# Altium PCB DataMergeBoard.PcbDoc (part 2 of 2)
Units mil, origin at the board's own origin, x right, y up, seen from the top; angles counter-clockwise.
Board outline 5250 x 1030 mil, 4 copper layers (Top Layer, Internal Plane 1, Internal Plane 2, Bottom Layer), stack 30.634 mil thick; 115 components, 100 nets, 456 pads, 199 vias.
Unrouted connection lines stored in the file: 1.
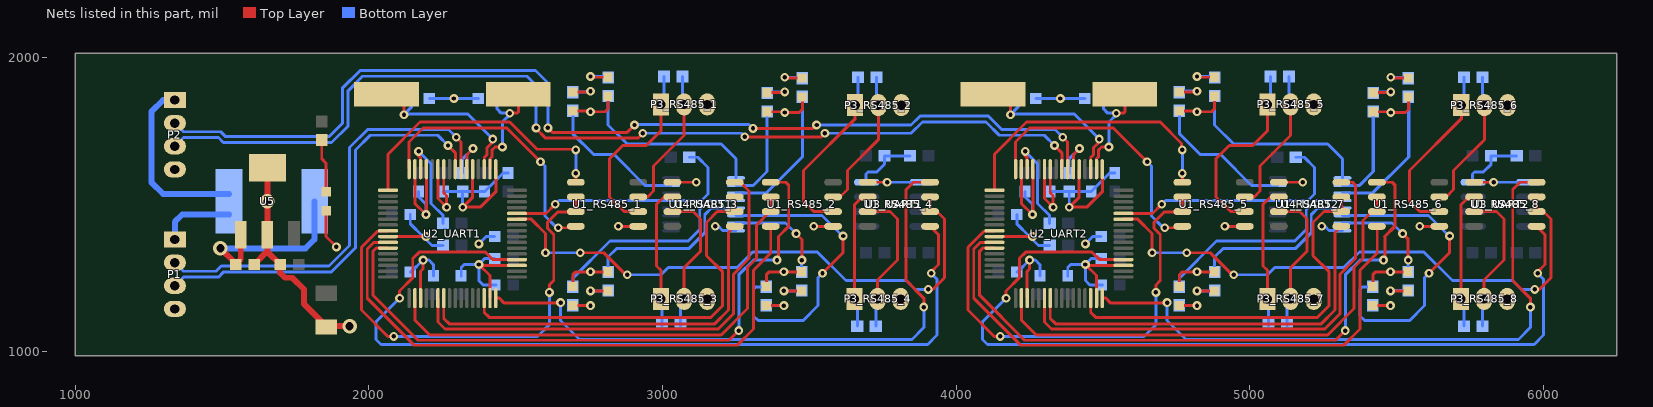
[diagram p4: the nets of this part, all layers, seen from the top]

## Via types
v1: diameter 30, hole 15, Top Layer to Bottom Layer, 191 vias
v2: diameter 50, hole 28, Top Layer to Bottom Layer, 4 vias
v3: diameter 200, hole 125, Top Layer to Bottom Layer, 4 vias

## Nets (pads, with @x,y where several pads share a name; then routed paths per layer and width w, separated by ;. In a path a pad name is that pad's centre, name@x,y a point inside that pad or via, vN(x,y) a via of type N, cw(c..) or ccw(c..) an arc to the next point about the centre after c; other vN are vias at no path point) (continued)
GND: C1_UART1.1 C1_UART2.1 C2_UART1.1 C2_UART2.1 C3_UART1.1 C3_UART2.1 C4_UART1.1 C4_UART2.1 C5_UART1.1 C5_UART2.1 C6_UART1.1 C6_UART2.1 C7_UART1.1 C7_UART2.1 C8_UART1.2 C8_UART2.2 C9_UART1.2 C9_UART2.2 C10_UART1.1 C10_UART2.1 C11_UART1.2 C11_UART2.2 C13_UART1.1 C13_UART2.1 C15_UART1.2 C15_UART2.2 C16.1 C17.2 C18.2 LED1_RS485_1.C LED1_RS485_2.C LED1_RS485_3.C LED1_RS485_4.C LED1_RS485_5.C LED1_RS485_6.C LED1_RS485_7.C LED1_RS485_8.C LED2_RS485_1.C LED2_RS485_2.C LED2_RS485_3.C LED2_RS485_4.C LED2_RS485_5.C LED2_RS485_6.C LED2_RS485_7.C LED2_RS485_8.C LED3.C P1.4 P2.4 P3_RS485_1.3 P3_RS485_2.3 P3_RS485_3.3 P3_RS485_4.3 P3_RS485_5.3 P3_RS485_6.3 P3_RS485_7.3 P3_RS485_8.3 R8_UART1.2 R8_UART2.2 R11_UART1.2 R11_UART2.2 U1_RS485_1.5 U1_RS485_2.5 U1_RS485_3.5 U1_RS485_4.5 U1_RS485_5.5 U1_RS485_6.5 U1_RS485_7.5 U1_RS485_8.5 U2_UART1.1 U2_UART1.5 U2_UART1.10 U2_UART1.11 U2_UART1.13 U2_UART1.15 U2_UART1.25 U2_UART1.35 U2_UART1.47 U2_UART1.51 U2_UART2.1 U2_UART2.5 U2_UART2.10 U2_UART2.11 U2_UART2.13 U2_UART2.15 U2_UART2.25 U2_UART2.35 U2_UART2.47 U2_UART2.51 U3_UART1.5 U3_UART2.5 U4_UART1.8 U4_UART2.8 U5.2 U5.4 | length 8612.1
  Top Layer w10: LED3.C@1855,1467.68 1855,1390 v1(1890,1355) ; U2_UART1.25@2065.51,1390.16 v1(2195.16,1390.16) ; U2_UART1.15@2157.05,1619.49 2157.05,1502.95 v1(2195,1465) 2196.42,1466.42 U2_UART1.13@2196.42,1619.49 ; U2_UART1.35@2176.73,1180.51 2176.73,1271.73 2185,1280 v1(2185,1310) ; U2_UART1.11@2235.79,1619.49 2235.79,1519.21 v1(2265,1490) 2265,1530 2255.47,1539.53 U2_UART1.10@2255.47,1619.49 ; U2_UART1.5@2353.9,1619.49 2353.9,1523.9 v1(2320,1490) 2380,1490 2432.64,1542.64 U2_UART1.1@2432.64,1619.49 ; v1(2375,1295) v1@2378.27,1291.73 ; U2_UART1.47@2412.95,1180.51 2412.95,1257.05 v1@2378.27,1291.73 ; U2_UART1.51@2504.49,1291.73 v1@2378.27,1291.73 ; LED1_RS485_3.C@2695,1219.96 2695,1260 2705,1270 v1(2755,1270) v1(2755,1270) LED2_RS485_3.C@2815,1269.96 ; LED1_RS485_1.C@2695,1817.52 2752.48,1817.52 v1(2755,1815) 2805,1815 2815,1825 LED2_RS485_1.C@2815,1867.52 ; v1(2850,1425) U1_RS485_1.5@2917.6,1425 ; U1_RS485_3.5@3038.7,1580 U1_RS485_3.5@3033.7,1575 v1(3115,1575) ; LED1_RS485_4.C@3353.7,1219.96 3353.7,1260 3363.7,1270 v1(3413.7,1270) v1(3413.7,1270) LED2_RS485_4.C@3473.7,1269.96 ; LED1_RS485_2.C@3356.18,1815.04 3413.66,1815.04 v1(3416.18,1812.52) 3466.18,1812.52 3476.18,1822.52 LED2_RS485_2.C@3476.18,1865.04 ; v1(3515,1425) U1_RS485_2.5@3581.3,1425 ; U1_RS485_4.5@3703.7,1570 U1_RS485_4.5@3698.7,1575 v1(3765,1575) ; U2_UART2.25@4130.51,1390.16 v1(4260.16,1390.16) ; U2_UART2.15@4222.05,1619.49 4222.05,1502.95 v1(4260,1465) 4261.42,1466.42 U2_UART2.13@4261.42,1619.49 ; U2_UART2.35@4241.73,1180.51 4241.73,1271.73 4250,1280 v1(4250,1310) ; U2_UART2.11@4300.79,1619.49 4300.79,1519.21 v1(4330,1490) 4330,1530 4320.47,1539.53 U2_UART2.10@4320.47,1619.49 ; U2_UART2.5@4418.9,1619.49 4418.9,1523.9 v1(4385,1490) 4445,1490 4497.64,1542.64 U2_UART2.1@4497.64,1619.49 ; v1(4440,1295) v1@4443.27,1291.73 ; U2_UART2.47@4477.95,1180.51 4477.95,1257.05 v1@4443.27,1291.73 ; U2_UART2.51@4569.49,1291.73 v1@4443.27,1291.73 ; LED1_RS485_7.C@4760,1219.96 4760,1260 4770,1270 v1(4820,1270) v1(4820,1270) LED2_RS485_7.C@4880,1269.96 ; LED1_RS485_5.C@4760,1817.52 4817.48,1817.52 v1(4820,1815) 4870,1815 4880,1825 LED2_RS485_5.C@4880,1867.52 ; v1(4915,1425) U1_RS485_5.5@4982.6,1425 ; U1_RS485_7.5@5103.7,1580 U1_RS485_7.5@5098.7,1575 v1(5180,1575) ; LED1_RS485_8.C@5418.7,1219.96 5418.7,1260 5428.7,1270 v1(5478.7,1270) v1(5478.7,1270) LED2_RS485_8.C@5538.7,1269.96 ; LED1_RS485_6.C@5419.88,1815.04 5477.36,1815.04 v1(5479.88,1812.52) 5529.88,1812.52 5539.88,1822.52 LED2_RS485_6.C@5539.88,1865.04 ; v1(5578.7,1425) U1_RS485_6.5@5645,1425 ; U1_RS485_8.5@5768.7,1570 U1_RS485_8.5@5763.7,1575 v1(5830,1575)
  Top Layer w20: C17.2@1610,1295 1655,1340 ; U5.4@1655,1624.17 v2(1655,1510) U5.2@1655,1395.83 1655,1340 ; v2(1935,1085) 1855,1085 1780,1160 1780,1210 1740,1250 1715,1250 1698.5,1266.5 C18.2@1698.5,1295 1655,1338.5 1655,1340
  Bottom Layer w10: C5_UART1.1@2141.5,1270 2145,1270 v1(2185,1310) 2205,1310 2220,1295 C2_UART1.1@2220,1256.5 ; C4_UART1.1@2141.5,1465 2141.5,1433.5 2184.84,1390.16 v1(2195.16,1390.16) 2195.16,1379.84 2215,1360 R8_UART1.2@2253.5,1360 ; C1_UART1.1@2170,1543.5 2170,1525 2195,1500 v1(2195,1465) ; C8_UART1.2@2206.5,1860 v1(2290,1860) C9_UART1.2@2373.5,1860 ; C13_UART1.1@2255,1543.5 R11_UART1.2@2320,1543.5 ; C6_UART1.1@2315,1256.5 2315,1285 2325,1295 v1(2375,1295) ; v1(2320,1490) R11_UART1.2@2320,1543.5 ; v1(2375,1365) 2400,1390 C7_UART1.1@2428.5,1390 ; C10_UART1.1@2428.5,1315 2395,1315 v1(2375,1295) ; C11_UART1.2@2433.5,1225 2390,1225 2375,1240 v1(2375,1295) ; C3_UART1.1@2475,1606.5 2457.99,1606.5 C15_UART1.2@2395,1543.5 R11_UART1.2@2320,1543.5 ; v1@3186.88,1418.12 v1(3180,1425) 3190,1425 3204.57,1410.43 U4_UART1.8@3250.24,1410.43 ; v1(3765,1575) U3_UART1.5@3884.49,1575 ; C5_UART2.1@4206.5,1270 4210,1270 v1(4250,1310) 4270,1310 4285,1295 C2_UART2.1@4285,1256.5 ; C4_UART2.1@4206.5,1465 4206.5,1433.5 4249.84,1390.16 v1(4260.16,1390.16) 4260.16,1379.84 4280,1360 R8_UART2.2@4318.5,1360 ; C1_UART2.1@4235,1543.5 4235,1525 4260,1500 v1(4260,1465) ; C8_UART2.2@4271.5,1860 v1(4355,1860) C9_UART2.2@4438.5,1860 ; C13_UART2.1@4320,1543.5 R11_UART2.2@4385,1543.5 ; C6_UART2.1@4380,1256.5 4380,1285 4390,1295 v1(4440,1295) ; v1(4385,1490) R11_UART2.2@4385,1543.5 ; v1(4440,1365) 4465,1390 C7_UART2.1@4493.5,1390 ; C10_UART2.1@4493.5,1315 4460,1315 v1(4440,1295) ; C11_UART2.2@4498.5,1225 4455,1225 4440,1240 v1(4440,1295) ; C3_UART2.1@4540,1606.5 4522.99,1606.5 C15_UART2.2@4460,1543.5 R11_UART2.2@4385,1543.5 ; v1@5251.88,1418.12 v1(5245,1425) 5255,1425 5269.57,1410.43 U4_UART2.8@5315.24,1410.43 ; v1(5830,1575) U3_UART2.5@5949.49,1575
NetC8_UART1_1: C8_UART1.1 U2_UART1.3 Y1_UART1.1 | length 646.3
  Top Layer w10: Y1_UART1.1@2060.59,1875 2080.59,1855 2120,1855 v1(2120,1805) ; U2_UART1.3@2393.27,1619.49 2393.27,1659.23 2402,1667.96 2402,1692 2430,1720 2424.5,1720 v1(2422.5,1722)
  Bottom Layer w10: C8_UART1.1@2143.5,1860 2145,1858.5 2145,1830 v1(2120,1805) 2122,1807 2337.5,1807 v1(2422.5,1722)
NetC8_UART2_1: C8_UART2.1 U2_UART2.3 Y1_UART2.1 | length 646.3
  Top Layer w10: Y1_UART2.1@4125.59,1875 4145.59,1855 4185,1855 v1(4185,1805) ; U2_UART2.3@4458.27,1619.49 4458.27,1659.23 4467,1667.96 4467,1692 4495,1720 4489.5,1720 v1(4487.5,1722)
  Bottom Layer w10: C8_UART2.1@4208.5,1860 4210,1858.5 4210,1830 v1(4185,1805) 4187,1807 4402.5,1807 v1(4487.5,1722)
NetC9_UART1_1: C9_UART1.1 U2_UART1.2 Y1_UART1.2 | length 451.1
  Top Layer w10: U2_UART1.2@2412.95,1619.49 2412.95,1654.87 2419,1660.92 2419,1684 2430,1695 v1(2455,1695) ; v1(2480,1810) 2505,1810 2509.41,1814.41 Y1_UART1.2@2509.41,1875 Y1_UART1.2@2480,1845.59
  Bottom Layer w10: C9_UART1.1@2436.5,1860 2436.5,1825 2451.5,1810 v1(2480,1810) 2480,1805 2455,1780 v1(2455,1695)
NetC9_UART2_1: C9_UART2.1 U2_UART2.2 Y1_UART2.2 | length 451.1
  Top Layer w10: U2_UART2.2@4477.95,1619.49 4477.95,1654.87 4484,1660.92 4484,1684 4495,1695 v1(4520,1695) ; v1(4545,1810) 4570,1810 4574.41,1814.41 Y1_UART2.2@4574.41,1875 Y1_UART2.2@4545,1845.59
  Bottom Layer w10: C9_UART2.1@4501.5,1860 4501.5,1825 4516.5,1810 v1(4545,1810) 4545,1805 4520,1780 v1(4520,1695)
NetC17_1: C17.1 F1.2 U5.1 | length 648.1
  Top Layer w10: U5.1@1564.45,1395.83 U5.1@1565,1395.28
  Top Layer w20: v2(1495,1350) 1547.01,1297.99 C17.1@1547.01,1295 1564.45,1312.44 U5.1@1564.45,1395.83
  Bottom Layer w20: v2(1495,1350) 1785,1350 1815.67,1380.67 F1.2@1815.67,1510
NetLED1_RS485_1_A: LED1_RS485_1.A R2_RS485_1.2 | length 122.5
  Top Layer w10: LED1_RS485_1.A@2695,1882.48 2752.52,1882.48 v1(2755,1885)
  Bottom Layer w10: R2_RS485_1.2@2695,1881.5 2751.5,1881.5 v1(2755,1885)
NetLED1_RS485_2_A: LED1_RS485_2.A R2_RS485_2.2 | length 122.5
  Top Layer w10: LED1_RS485_2.A@3356.18,1880 3413.7,1880 v1(3416.18,1882.52)
  Bottom Layer w10: R2_RS485_2.2@3356.18,1879.02 3359.69,1882.52 v1(3416.18,1882.52)
NetLED1_RS485_3_A: LED1_RS485_3.A R2_RS485_3.2 | length 120.4
  Top Layer w10: LED1_RS485_3.A@2695,1155 v1(2755,1155)
  Bottom Layer w10: R2_RS485_3.2@2695,1155.98 2695.98,1155 v1(2755,1155)
NetLED1_RS485_4_A: LED1_RS485_4.A R2_RS485_4.2 | length 120.4
  Top Layer w10: LED1_RS485_4.A@3353.7,1155 v1(3413.7,1155)
  Bottom Layer w10: R2_RS485_4.2@3353.7,1155.98 3354.68,1155 v1(3413.7,1155)
NetLED1_RS485_5_A: LED1_RS485_5.A R2_RS485_5.2 | length 122.5
  Top Layer w10: LED1_RS485_5.A@4760,1882.48 4817.52,1882.48 v1(4820,1885)
  Bottom Layer w10: R2_RS485_5.2@4760,1881.5 4763.5,1885 v1(4820,1885)
NetLED1_RS485_6_A: LED1_RS485_6.A R2_RS485_6.2 | length 122.5
  Top Layer w10: LED1_RS485_6.A@5419.88,1880 5477.4,1880 v1(5479.88,1882.52)
  Bottom Layer w10: R2_RS485_6.2@5419.88,1879.02 5423.39,1882.52 v1(5479.88,1882.52)
NetLED1_RS485_7_A: LED1_RS485_7.A R2_RS485_7.2 | length 120.4
  Top Layer w10: LED1_RS485_7.A@4760,1155 v1(4820,1155)
  Bottom Layer w10: R2_RS485_7.2@4760,1155.98 4760.98,1155 v1(4820,1155)
NetLED1_RS485_8_A: LED1_RS485_8.A R2_RS485_8.2 | length 120.4
  Top Layer w10: LED1_RS485_8.A@5418.7,1155 v1(5478.7,1155)
  Bottom Layer w10: R2_RS485_8.2@5418.7,1155.98 5419.69,1155 v1(5478.7,1155)
NetLED2_RS485_1_A: LED2_RS485_1.A R3_RS485_1.2 | length 122.5
  Top Layer w10: v1(2755,1935) 2757.48,1932.48 LED2_RS485_1.A@2815,1932.48
  Bottom Layer w10: v1(2755,1935) 2811.5,1935 R3_RS485_1.2@2815,1931.5
NetLED2_RS485_2_A: LED2_RS485_2.A R3_RS485_2.2 | length 122.5
  Top Layer w10: v1(3416.18,1932.52) 3418.66,1930 LED2_RS485_2.A@3476.18,1930
  Bottom Layer w10: v1(3416.18,1932.52) 3472.68,1932.52 R3_RS485_2.2@3476.18,1929.02
NetLED2_RS485_3_A: LED2_RS485_3.A R3_RS485_3.2 | length 120.4
  Top Layer w10: v1(2755,1205) LED2_RS485_3.A@2815,1205
  Bottom Layer w10: v1(2755,1205) 2814.02,1205 R3_RS485_3.2@2815,1205.98
NetLED2_RS485_4_A: LED2_RS485_4.A R3_RS485_4.2 | length 120.4
  Top Layer w10: v1(3413.7,1205) LED2_RS485_4.A@3473.7,1205
  Bottom Layer w10: v1(3413.7,1205) 3472.72,1205 R3_RS485_4.2@3473.7,1205.98
NetLED2_RS485_5_A: LED2_RS485_5.A R3_RS485_5.2 | length 122.5
  Top Layer w10: v1(4820,1935) 4822.48,1932.48 LED2_RS485_5.A@4880,1932.48
  Bottom Layer w10: v1(4820,1935) 4876.5,1935 R3_RS485_5.2@4880,1931.5
NetLED2_RS485_6_A: LED2_RS485_6.A R3_RS485_6.2 | length 122.5
  Top Layer w10: v1(5479.88,1932.52) 5482.36,1930 LED2_RS485_6.A@5539.88,1930
  Bottom Layer w10: v1(5479.88,1932.52) 5536.38,1932.52 R3_RS485_6.2@5539.88,1929.02
NetLED2_RS485_7_A: LED2_RS485_7.A R3_RS485_7.2 | length 120.4
  Top Layer w10: v1(4820,1205) LED2_RS485_7.A@4880,1205
  Bottom Layer w10: v1(4820,1205) 4879.02,1205 R3_RS485_7.2@4880,1205.98
NetLED2_RS485_8_A: LED2_RS485_8.A R3_RS485_8.2 | length 120.4
  Top Layer w10: v1(5478.7,1205) LED2_RS485_8.A@5538.7,1205
  Bottom Layer w10: v1(5478.7,1205) 5479.68,1205.98 R3_RS485_8.2@5538.7,1205.98
NetLED3_A: LED3.A R12.2 | length 172.4
  Top Layer w10: R12.2@1840,1718.5 1840,1655 1855,1640 LED3.A@1855,1552.32
NetP3_RS485_1_1: P3_RS485_1.1 R1_RS485_1.2 U1_RS485_1.6 | length 651.7
  Top Layer w10: U1_RS485_1.6@2917.6,1475 2870,1475 2820,1525 2820,1655 2865,1700 2945,1700 2995,1750 P3_RS485_1.1@2995,1840
  Bottom Layer w10: P3_RS485_1.1@2995,1840 3004.8,1849.8 R1_RS485_1.2@3004.8,1935
NetP3_RS485_1_2: P3_RS485_1.2 R1_RS485_1.1 U1_RS485_1.7 | length 513.7
  Top Layer w10: U1_RS485_1.7@2900,1525 U1_RS485_1.7@2917.6,1525 2950,1525 2970,1545 2970,1630 3073.74,1733.74 P3_RS485_1.2@3073.74,1840
  Bottom Layer w10: R1_RS485_1.1@3067.8,1935 3067.8,1845.94 P3_RS485_1.2@3073.74,1840
NetP3_RS485_2_1: P3_RS485_2.1 R1_RS485_2.2 U1_RS485_2.6 | length 615.4
  Top Layer w10: U1_RS485_2.6@3581.3,1475 3515,1475 3480,1510 3480,1615 3656.18,1791.18 P3_RS485_2.1@3656.18,1837.52
  Bottom Layer w10: P3_RS485_2.1@3656.18,1837.52 3665.98,1847.32 R1_RS485_2.2@3665.98,1932.52
NetP3_RS485_2_2: P3_RS485_2.2 R1_RS485_2.1 U1_RS485_2.7 | length 487.5
  Top Layer w10: U1_RS485_2.7@3581.3,1525 3605,1525 3630,1550 3630,1615 3734.92,1719.92 P3_RS485_2.2@3734.92,1837.52
  Bottom Layer w10: R1_RS485_2.1@3728.98,1932.52 3728.98,1843.47 P3_RS485_2.2@3734.92,1837.52
NetP3_RS485_3_1: P3_RS485_3.1 R1_RS485_3.2 U1_RS485_3.6 | length 493.8
  Top Layer w10: P3_RS485_3.1@3000,1182.48 P3_RS485_3.1@2995,1177.48 2995,1275 2980,1290 2980,1500 3005,1525 U1_RS485_3.6@3033.7,1525
  Bottom Layer w10: P3_RS485_3.1@2995,1177.48 2998.5,1173.98 R1_RS485_3.2@2998.5,1085
NetP3_RS485_3_2: P3_RS485_3.2 R1_RS485_3.1 U1_RS485_3.7 | length 500
  Top Layer w10: U1_RS485_3.7@3033.7,1475 3105,1475 3130,1450 3130,1340 3073.74,1283.74 P3_RS485_3.2@3073.74,1177.48
  Bottom Layer w10: R1_RS485_3.1@3061.5,1085 3061.5,1165.24 P3_RS485_3.2@3073.74,1177.48
NetP3_RS485_4_1: P3_RS485_4.1 R1_RS485_4.2 U1_RS485_4.6 | length 487.8
  Top Layer w10: P3_RS485_4.1@3655,1177.48 P3_RS485_4.1@3660,1182.48 ; P3_RS485_4.1@3658.7,1182.48 P3_RS485_4.1@3653.7,1177.48 3653.7,1498.7 3680,1525 U1_RS485_4.6@3698.7,1525
  Bottom Layer w10: P3_RS485_4.1@3653.7,1177.48 3663.5,1167.68 R1_RS485_4.2@3663.5,1085
NetP3_RS485_4_2: P3_RS485_4.2 R1_RS485_4.1 U1_RS485_4.7 | length 507.1
  Top Layer w10: U1_RS485_4.7@3698.7,1475 3775,1475 3800,1450 3800,1310 3732.44,1242.44 P3_RS485_4.2@3732.44,1177.48
  Bottom Layer w10: R1_RS485_4.1@3726.5,1085 3726.5,1171.53 P3_RS485_4.2@3732.44,1177.48
NetP3_RS485_5_1: P3_RS485_5.1 R1_RS485_5.2 U1_RS485_5.6 | length 651.7
  Top Layer w10: U1_RS485_5.6@4982.6,1475 4935,1475 4885,1525 4885,1655 4930,1700 5010,1700 5060,1750 P3_RS485_5.1@5060,1840
  Bottom Layer w10: P3_RS485_5.1@5060,1840 5069.8,1849.8 R1_RS485_5.2@5069.8,1935
NetP3_RS485_5_2: P3_RS485_5.2 R1_RS485_5.1 U1_RS485_5.7 | length 513.7
  Top Layer w10: U1_RS485_5.7@4965,1525 U1_RS485_5.7@4982.6,1525 5015,1525 5035,1545 5035,1630 5138.74,1733.74 P3_RS485_5.2@5138.74,1840
  Bottom Layer w10: R1_RS485_5.1@5132.8,1935 5132.8,1845.94 P3_RS485_5.2@5138.74,1840
NetP3_RS485_6_1: P3_RS485_6.1 R1_RS485_6.2 U1_RS485_6.6 | length 615.4
  Top Layer w10: U1_RS485_6.6@5645,1475 5578.7,1475 5543.7,1510 5543.7,1615 5719.88,1791.18 P3_RS485_6.1@5719.88,1837.52
  Bottom Layer w10: P3_RS485_6.1@5719.88,1837.52 5729.68,1847.32 R1_RS485_6.2@5729.68,1932.52
NetP3_RS485_6_2: P3_RS485_6.2 R1_RS485_6.1 U1_RS485_6.7 | length 487.5
  Top Layer w10: U1_RS485_6.7@5645,1525 5668.7,1525 5693.7,1550 5693.7,1615 5798.62,1719.92 P3_RS485_6.2@5798.62,1837.52
  Bottom Layer w10: R1_RS485_6.1@5792.68,1932.52 5792.68,1843.47 P3_RS485_6.2@5798.62,1837.52
NetP3_RS485_7_1: P3_RS485_7.1 R1_RS485_7.2 U1_RS485_7.6 | length 493.8
  Top Layer w10: P3_RS485_7.1@5065,1182.48 P3_RS485_7.1@5060,1177.48 5060,1275 5045,1290 5045,1500 5070,1525 U1_RS485_7.6@5098.7,1525
  Bottom Layer w10: P3_RS485_7.1@5060,1177.48 5063.5,1173.98 R1_RS485_7.2@5063.5,1085
NetP3_RS485_7_2: P3_RS485_7.2 R1_RS485_7.1 U1_RS485_7.7 | length 500
  Top Layer w10: U1_RS485_7.7@5098.7,1475 5170,1475 5195,1450 5195,1340 5138.74,1283.74 P3_RS485_7.2@5138.74,1177.48
  Bottom Layer w10: R1_RS485_7.1@5126.5,1085 5126.5,1165.24 P3_RS485_7.2@5138.74,1177.48
NetP3_RS485_8_1: P3_RS485_8.1 R1_RS485_8.2 U1_RS485_8.6 | length 487.8
  Top Layer w10: P3_RS485_8.1@5720,1177.48 P3_RS485_8.1@5725,1182.48 ; P3_RS485_8.1@5723.7,1182.48 P3_RS485_8.1@5718.7,1177.48 5718.7,1498.7 5745,1525 U1_RS485_8.6@5763.7,1525
  Bottom Layer w10: P3_RS485_8.1@5718.7,1177.48 5728.5,1167.68 R1_RS485_8.2@5728.5,1085
NetP3_RS485_8_2: P3_RS485_8.2 R1_RS485_8.1 U1_RS485_8.7 | length 507.1
  Top Layer w10: U1_RS485_8.7@5763.7,1475 5840,1475 5865,1450 5865,1310 5797.44,1242.44 P3_RS485_8.2@5797.44,1177.48
  Bottom Layer w10: R1_RS485_8.1@5791.5,1085 5791.5,1171.53 P3_RS485_8.2@5797.44,1177.48
NetR2_RS485_1_1: R2_RS485_1.1 U4_UART1.15 | length 486.2
  Bottom Layer w10: R2_RS485_1.1@2695,1818.5 2695,1740 2765,1670 2835,1670 2941.02,1563.98 U4_UART1.15@3029.76,1563.98
NetR2_RS485_2_1: R2_RS485_2.1 U4_UART1.2 | length 330.3
  Bottom Layer w10: U4_UART1.2@3250.24,1563.98 3308.98,1563.98 3356.18,1611.18 R2_RS485_2.1@3356.18,1816.02
NetR2_RS485_3_1: R2_RS485_3.1 U4_UART1.4 | length 734
  Bottom Layer w10: R2_RS485_3.1@2695,1218.98 2695,1248.18 2821.82,1375 3088.18,1375 3127,1413.82 3127,1482 3157.8,1512.8 U4_UART1.4@3250.24,1512.8
NetR2_RS485_4_1: R2_RS485_4.1 U4_UART1.6 | length 1050.1
  Top Layer w10: v1(3545,1265) 3615,1335 v1(3615,1392)
  Bottom Layer w10: U4_UART1.6@3250.24,1461.61 3543.39,1461.61 3613,1392 v1(3615,1392) ; R2_RS485_4.1@3353.7,1218.98 3318.98,1218.98 3310,1210 3310,1120 3325,1105 3480,1105 3530,1155 3530,1250 v1(3545,1265)
NetR2_RS485_5_1: R2_RS485_5.1 U4_UART2.15 | length 972.4
  Bottom Layer w10: 4760,1740 4830,1670 ; 4760,1740 R2_RS485_5.1@4760,1818.5 4760,1740 ; 4760,1740 4830,1670 ; 4830,1670 4900,1670 ; 4830,1670 4900,1670 ; 4900,1670 5006.02,1563.98 ; 4900,1670 5006.02,1563.98 ; 5006.02,1563.98 U4_UART2.15@5094.76,1563.98 5006.02,1563.98
NetR2_RS485_6_1: R2_RS485_6.1 U4_UART2.2 | length 601.9
  Bottom Layer w10: U4_UART2.2@5315.24,1563.98 5373.98,1563.98 5421.18,1611.18 R2_RS485_6.1@5421.18,1816.02 ; 5372.68,1563.98 5419.88,1611.18 R2_RS485_6.1@5419.88,1816.02
NetR2_RS485_7_1: R2_RS485_7.1 U4_UART2.4 | length 1468
  Bottom Layer w10: 4760,1248.18 R2_RS485_7.1@4760,1218.98 4760,1248.18 ; 4760,1248.18 4886.82,1375 ; 4760,1248.18 4886.82,1375 ; 4886.82,1375 5153.18,1375 ; 4886.82,1375 5153.18,1375 ; 5153.18,1375 5192,1413.82 ; 5153.18,1375 5192,1413.82 ; 5192,1413.82 5192,1482 ; 5192,1413.82 5192,1482 ; 5192,1482 5222.8,1512.8 ; 5192,1482 5222.8,1512.8 ; 5222.8,1512.8 U4_UART2.4@5315.24,1512.8 5222.8,1512.8
NetR2_RS485_8_1: R2_RS485_8.1 U4_UART2.6 | length 1807.1
  Top Layer w10: 5680,1335 v1(5680,1392) 5680,1335 ; 5680,1335 v1(5610,1265) 5680,1335
  Bottom Layer w10: U4_UART2.6@5315.24,1461.61 5608.39,1461.61 ; 5375,1120 5390,1105 ; 5375,1120 5375,1210 ; 5375,1120 5390,1105 ; 5375,1120 5375,1210 ; 5375,1210 5383.98,1218.98 ; 5375,1210 5383.98,1218.98 ; 5383.98,1218.98 R2_RS485_8.1@5418.7,1218.98 5383.98,1218.98 ; 5390,1105 5545,1105 ; 5390,1105 5545,1105 ; 5545,1105 5595,1155 ; 5545,1105 5595,1155 ; 5595,1155 5595,1250 ; 5595,1155 5595,1250 ; 5595,1250 v1(5610,1265) 5595,1250 ; 5608.39,1461.61 v1@5678,1392 ; 5608.39,1461.61 v1@5678,1392 ; v1@5678,1392 v1(5680,1392) v1@5678,1392
  other v1: 5610,1265 5680,1392
NetR3_RS485_1_1: R3_RS485_1.1 U4_UART1.1 | length 646.7
  Bottom Layer w10: R3_RS485_1.1@2815,1868.5 2815,1770 2880,1705 3200,1705 3250.24,1654.76 U4_UART1.1@3250.24,1589.57
NetR3_RS485_2_1: R3_RS485_2.1 U4_UART1.3 | length 481.7
  Bottom Layer w10: U4_UART1.3@3250.24,1538.39 3353.39,1538.39 3476.18,1661.18 R3_RS485_2.1@3476.18,1866.02
NetR3_RS485_3_1: R3_RS485_3.1 U4_UART1.5 | length 591.4
  Bottom Layer w10: R3_RS485_3.1@2815,1268.98 2815,1320 2845,1350 3091.23,1350 3144,1402.77 3144,1464 3167.2,1487.2 U4_UART1.5@3250.24,1487.2
NetR3_RS485_4_1: R3_RS485_4.1 U4_UART1.7 | length 359
  Top Layer w10: v1(3455,1400) 3475,1380 v1(3475,1310)
  Bottom Layer w10: U4_UART1.7@3250.24,1436.02 3418.98,1436.02 v1(3455,1400) ; R3_RS485_4.1@3473.7,1268.98 v1@3473.7,1310
NetR3_RS485_5_1: R3_RS485_5.1 U4_UART2.1 | length 1293.3
  Bottom Layer w10: 4880,1770 4945,1705 ; 4880,1770 R3_RS485_5.1@4880,1868.5 4880,1770 ; 4880,1770 4945,1705 ; 4945,1705 5265,1705 ; 4945,1705 5265,1705 ; 5265,1705 5315.24,1654.76 ; 5265,1705 5315.24,1654.76 ; 5315.24,1654.76 U4_UART2.1@5315.24,1589.57 5315.24,1654.76
NetR3_RS485_6_1: R3_RS485_6.1 U4_UART2.3 | length 860.2
  Bottom Layer w10: U4_UART2.3@5315.24,1538.39 5418.39,1538.39 5541.18,1661.18 R3_RS485_6.1@5541.18,1866.02 ; 5417.09,1538.39 5539.88,1661.18 R3_RS485_6.1@5539.88,1866.02
NetR3_RS485_7_1: R3_RS485_7.1 U4_UART2.5 | length 591.4
  Bottom Layer w10: R3_RS485_7.1@4880,1268.98 4880,1320 4910,1350 5156.23,1350 5209,1402.77 5209,1464 5232.2,1487.2 U4_UART2.5@5315.24,1487.2
NetR3_RS485_8_1: R3_RS485_8.1 U4_UART2.7 | length 409.5
  Top Layer w10: v1(5520,1400) 5539,1381 v1(5539,1310)
  Bottom Layer w10: U4_UART2.7@5315.24,1436.02 5483.98,1436.02 ; R3_RS485_8.1@5538.7,1268.98 v1@5538.7,1310 ; 5483.98,1436.02 v1(5520,1400) 5483.98,1436.02
  other v1: 5520,1400
NetR4_UART1_2: R4_UART1.2 R9_UART1.1 U3_UART1.4 | length 221.5
  Bottom Layer w10: U3_UART1.4@3695.51,1575 3693.5,1577.01 3693.5,1603.5 3700,1610 3730,1610 3756.5,1636.5 R9_UART1.1@3756.5,1665 R4_UART1.2@3843.5,1665
NetR4_UART2_2: R4_UART2.2 R9_UART2.1 U3_UART2.4 | length 221.5
  Bottom Layer w10: U3_UART2.4@5760.51,1575 5758.5,1577.01 5758.5,1603.5 5765,1610 5795,1610 5821.5,1636.5 R9_UART2.1@5821.5,1665 R4_UART2.2@5908.5,1665
NetR7_UART1_2: R7_UART1.2 U2_UART1.14 | length 342.9
  Top Layer w10: v1(2170,1680) 2170,1665 2176.73,1658.27 U2_UART1.14@2176.73,1619.49
  Bottom Layer w10: v1(2170,1680) 2212,1638 2212,1503 2253.5,1461.5 R7_UART1.2@2253.5,1435
NetR7_UART2_2: R7_UART2.2 U2_UART2.14 | length 342.9
  Top Layer w10: v1(4235,1680) 4235,1665 4241.73,1658.27 U2_UART2.14@4241.73,1619.49
  Bottom Layer w10: v1(4235,1680) 4277,1638 4277,1503 4318.5,1461.5 R7_UART2.2@4318.5,1435
NetR11_UART1_1: R11_UART1.1 U2_UART1.6 | length 177.1
  Top Layer w10: U2_UART1.6@2334.21,1619.49 2334.21,1669.21 v1(2355,1690)
  Bottom Layer w10: R11_UART1.1@2320,1606.5 2320,1655 v1(2355,1690)
NetR11_UART2_1: R11_UART2.1 U2_UART2.6 | length 177.1
  Top Layer w10: U2_UART2.6@4399.21,1619.49 4399.21,1669.21 v1(4420,1690)
  Bottom Layer w10: R11_UART2.1@4385,1606.5 4385,1655 v1(4420,1690)
NetU1_RS485_1_1: U1_RS485_1.1 U2_UART1.17 | length 957.1
  Top Layer w10: U2_UART1.17@2065.51,1547.64 2065.51,1670.51 2175,1780 2480,1780 2572.66,1687.34 2702.66,1687.34 v1(2705,1685) ; U1_RS485_1.1@2705,1575 v1(2705,1605)
  Bottom Layer w10: v1(2705,1605) v1(2705,1685)
NetU1_RS485_1_2: U1_RS485_1.2 U1_RS485_1.3 U2_UART1.24 | length 1548
  Top Layer w10: U2_UART1.24@2065.51,1409.84 2063.73,1408.06 2029.55,1408.06 1975,1353.51 1975,1140 2065,1050 v1(2085,1050) ; v1(2615,1200) 2615,1225 2630,1240 2630,1396.82 2608,1418.82 2608,1438 2643,1473 2705,1473 U1_RS485_1.3@2705,1475 U1_RS485_1.2@2705,1525
  Bottom Layer w10: v1(2085,1050) 2575,1050 2615,1090 v1(2615,1200)
NetU1_RS485_1_4: U1_RS485_1.4 U2_UART1.16 | length 922.7
  Top Layer w10: U2_UART1.16@2137.36,1619.49 2137.36,1712.36 2185,1760 2355,1760 2470,1760 v1(2585,1645) ; v1(2645,1420) 2700,1420 U1_RS485_1.4@2705,1425
  Bottom Layer w10: v1(2585,1645) 2600,1630 2600,1460 2640,1420 v1(2645,1420)
NetU1_RS485_2_1: U1_RS485_2.1 U2_UART1.27 | length 2204.7
  Top Layer w10: U2_UART1.27@2065.51,1350.79 2025.79,1350.79 2015,1340 2015,1190 2168,1037 3227,1037 v1(3260,1070) ; U1_RS485_2.1@3368.7,1575 3420,1575 3430,1565 3430,1425 3395,1390 3395,1315 v1(3390,1310)
  Bottom Layer w10: v1(3260,1070) 3260,1260 3310,1310 v1(3390,1310)
NetU1_RS485_2_2: U1_RS485_2.2 U1_RS485_2.3 U2_UART1.34 | length 1679.9
  Top Layer w10: U2_UART1.34@2157.05,1180.51 2157.05,1105.95 2208,1055 3200,1055 3290,1145 3290,1285 3320,1315 3320,1428.67 3366.33,1475 U1_RS485_2.3@3368.7,1475 U1_RS485_2.2@3368.7,1525
NetU1_RS485_2_4: U1_RS485_2.4 U2_UART1.26 | length 2025.9
  Top Layer w10: U2_UART1.26@2065.51,1370.47 2017.97,1370.47 1995,1347.5 1995,1180 2155,1020 3255,1020 3310,1075 3310,1275 3368.7,1333.7 U1_RS485_2.4@3368.7,1425
NetU1_RS485_3_1: U1_RS485_3.1 U2_UART1.39 | length 1375.8
  Top Layer w10: U2_UART1.39@2255.47,1180.51 2255.47,1111.53 2274,1093 3178,1093 3225,1140 3225,1403.7 U1_RS485_3.1@3246.3,1425 U1_RS485_3.1@3230,1425
NetU1_RS485_3_2: U1_RS485_3.2 U1_RS485_3.3 U2_UART1.46 | length 1351.4
  Top Layer w10: U2_UART1.46@2393.27,1180.51 2393.27,1131.73 2410,1115 3165,1115 3205,1155 3205,1270 3150,1325 3150,1438 3187,1475 U1_RS485_3.2@3246.3,1475 U1_RS485_3.3@3246.3,1525
NetU1_RS485_3_4: U1_RS485_3.4 U2_UART1.38 | length 1620.2
  Top Layer w10: U2_UART1.38@2235.79,1180.51 2235.79,1099.21 2260,1075 3190,1075 3242,1127 3242,1262 3295,1315 3295,1545 3265,1575 U1_RS485_3.4@3246.3,1575
NetU1_RS485_4_1: U1_RS485_4.1 U2_UART1.52 | length 3031.8
  Top Layer w10: v1(2105,1180) 2105,1205 2150,1250 2150,1315 2172,1337 2398,1337 2423.58,1311.42 U2_UART1.52@2504.49,1311.42 ; U1_RS485_4.1@3911.3,1425 3940,1396.3 3940,1295 3915,1270 v1(3915,1265)
  Bottom Layer w10: v1(2105,1180) 2025,1100 2025,1040 2042,1023 3903,1023 3935,1055 3935,1245 v1(3915,1265)
NetU1_RS485_4_2: U1_RS485_4.2 U1_RS485_4.3 U2_UART1.59 | length 1959.6
  Top Layer w10: U2_UART1.59@2504.49,1449.21 2553.56,1449.21 2602,1400.77 2602,1352 v1(2602,1335) ; v1(2720,1335) 2800,1335 2875,1260 v1(2880,1260) ; v1(3905,1210) 3920,1210 3960,1250 3960,1450 U1_RS485_4.2@3935,1475 ; U1_RS485_4.2@3911.3,1475 U1_RS485_4.3@3911.3,1525
  Bottom Layer w10: v1(2602,1335) v1(2720,1335) ; v1(2880,1260) 2995,1260 3020,1285 3255,1285 3307.89,1337.89 3527.11,1337.89 3625,1240 3830,1240 3860,1210 v1(3905,1210)
NetU1_RS485_4_4: U1_RS485_4.4 U2_UART1.48 | length 2156.9
  Top Layer w10: U2_UART1.48@2432.64,1180.51 2444.49,1180.51 2461.68,1163.32 2653.32,1163.32 v1(2653.32,1165.13) ; v1(3890,1150) 3890,1180 3830,1240 3830,1550 3855,1575 U1_RS485_4.4@3911.3,1575
  Bottom Layer w10: v1(2653.32,1165.13) 2653.32,1104.27 2717.59,1040 3850,1040 3890,1080 v1(3890,1150)
NetU1_RS485_5_1: U1_RS485_5.1 U2_UART2.17 | length 1102.1
  Top Layer w10: U2_UART2.17@4130.51,1547.64 4130.51,1670.51 4240,1780 4695,1780 4767.66,1707.34 ; v1@4767.66,1687.34 4767.66,1707.34 ; v1@4767.66,1687.34 v1(4770,1685) v1@4767.66,1687.34 ; v1@4767.66,1687.34 4767.66,1707.34 ; U1_RS485_5.1@4770,1575 v1(4770,1605) U1_RS485_5.1@4770,1575
  Bottom Layer w10: v1(4770,1605) v1(4770,1685) v1(4770,1605)
  other v1: 4770,1605 4770,1685
NetU1_RS485_5_2: U1_RS485_5.2 U1_RS485_5.3 U2_UART2.24 | length 1550
  Top Layer w10: U2_UART2.24@4130.51,1409.84 4128.73,1408.06 4094.55,1408.06 4040,1353.51 4040,1140 4130,1050 v1(4150,1050) ; v1(4680,1200) 4680,1225 4695,1240 4695,1396.82 4673,1418.82 4673,1438 4708,1473 U1_RS485_5.3@4770,1473 ; U1_RS485_5.2@4770,1525 U1_RS485_5.3@4770,1475 ; U1_RS485_5.3@4770,1473 U1_RS485_5.3@4770,1475 ; U1_RS485_5.3@4770,1473 U1_RS485_5.3@4770,1475
  Bottom Layer w10: v1(4150,1050) 4640,1050 4680,1090 v1(4680,1200)
NetU1_RS485_5_4: U1_RS485_5.4 U2_UART2.16 | length 984.8
  Top Layer w10: U2_UART2.16@4202.36,1619.49 4202.36,1712.36 4250,1760 4420,1760 4535,1760 v1(4650,1645) ; U1_RS485_5.4@4765,1420 v1(4710,1420) U1_RS485_5.4@4765,1420 ; U1_RS485_5.4@4765,1420 U1_RS485_5.4@4770,1425 U1_RS485_5.4@4765,1420
  Bottom Layer w10: v1(4650,1645) 4665,1630 4665,1460 4705,1420 v1(4710,1420)
  other v1: 4710,1420
NetU1_RS485_6_1: U1_RS485_6.1 U2_UART2.27 | length 2409.7
  Top Layer w10: U2_UART2.27@4130.51,1350.79 4090.79,1350.79 4080,1340 4080,1190 4233,1037 5292,1037 v1(5325,1070) ; U1_RS485_6.1@5432.4,1575 5485,1575 5495,1565 5495,1425 5460,1390 5460,1315 v1(5455,1310) ; 5458.7,1390 5493.7,1425 5493.7,1565 5483.7,1575
  Bottom Layer w10: v1(5325,1070) 5325,1260 5375,1310 v1(5455,1310)
NetU1_RS485_6_2: U1_RS485_6.2 U1_RS485_6.3 U2_UART2.34 | length 1692
  Top Layer w10: U2_UART2.34@4222.05,1180.51 4222.05,1105.95 4273,1055 5265,1055 5355,1145 5355,1285 5385,1315 5385,1445 5422.51,1482.51 U1_RS485_6.3@5430.03,1475 ; U1_RS485_6.3@5432.4,1475 U1_RS485_6.2@5432.4,1525
NetU1_RS485_6_4: U1_RS485_6.4 U2_UART2.26 | length 2025.9
  Top Layer w10: U2_UART2.26@4130.51,1370.47 4082.97,1370.47 4060,1347.5 4060,1180 4220,1020 5320,1020 5375,1075 5375,1275 5433.7,1333.7 U1_RS485_6.4@5433.7,1425
NetU1_RS485_7_1: U1_RS485_7.1 U2_UART2.39 | length 1375.8
  Top Layer w10: U2_UART2.39@4320.47,1180.51 4320.47,1111.53 4339,1093 5243,1093 5290,1140 5290,1403.7 U1_RS485_7.1@5311.3,1425 U1_RS485_7.1@5295,1425
NetU1_RS485_7_2: U1_RS485_7.2 U1_RS485_7.3 U2_UART2.46 | length 1576
  Top Layer w10: U2_UART2.46@4458.27,1180.51 4458.27,1131.73 4475,1115 5230,1115 5270,1155 5270,1270 5215,1325 ; U1_RS485_7.3@5311.3,1525 U1_RS485_7.2@5311.3,1475 ; 5215,1325 5215,1438 ; 5215,1325 5215,1438 ; 5215,1438 5252,1475 ; 5215,1438 5252,1475 ; 5252,1475 U1_RS485_7.2@5311.3,1475 ; 5252,1475 U1_RS485_7.2@5311.3,1475
NetU1_RS485_7_4: U1_RS485_7.4 U2_UART2.38 | length 1628.2
  Top Layer w10: U2_UART2.38@4300.79,1180.51 4300.79,1099.21 4325,1075 5255,1075 5307,1127 5307,1262 5360,1315 5360,1565 5350,1575 U1_RS485_7.4@5315,1575
NetU1_RS485_8_1: U1_RS485_8.1 U2_UART2.52 | length 3477.6
  Top Layer w10: v1(4170,1180) 4170,1205 4215,1250 4215,1315 4237,1337 4463,1337 4488.58,1311.42 U2_UART2.52@4569.49,1311.42 ; v1@5980,1270 v1(5980,1265) v1@5980,1270 ; v1@5980,1270 6005,1295 ; v1@5980,1270 6005,1295 ; 6005,1295 6005,1396.3 ; 6005,1295 6005,1396.3 ; 6005,1396.3 U1_RS485_8.1@5976.3,1425 6005,1396.3
  Bottom Layer w10: v1(4170,1180) 4090,1100 4090,1040 4107,1023 5968,1023 ; 5968,1023 6000,1055 ; 5968,1023 6000,1055 ; 6000,1055 6000,1245 ; 6000,1055 6000,1245 ; 6000,1245 v1(5980,1265) 6000,1245
  other v1: 5980,1265
NetU1_RS485_8_2: U1_RS485_8.2 U1_RS485_8.3 U2_UART2.59 | length 2906.6
  Top Layer w10: U2_UART2.59@4569.49,1449.21 4618.56,1449.21 4667,1400.77 4667,1362 v1@4667,1345 ; v1(4785,1335) 4865,1335 4940,1260 v1(4945,1260) ; U1_RS485_8.2@5976.3,1475 U1_RS485_8.3@5976.3,1525 ; 5985,1210 v1(5970,1210) 5985,1210 ; 5985,1210 6025,1250 ; 5985,1210 6025,1250 ; 6025,1250 6025,1450 ; 6025,1250 6025,1450 ; 6025,1450 6000,1475 6025,1450
  Bottom Layer w10: v1(4667,1335) v1(4785,1335) ; v1(4945,1260) 5060,1260 5085,1285 5320,1285 5372.89,1337.89 ; 5372.89,1337.89 5592.11,1337.89 ; 5372.89,1337.89 5592.11,1337.89 ; 5592.11,1337.89 5690,1240 ; 5592.11,1337.89 5690,1240 ; 5690,1240 5895,1240 ; 5690,1240 5895,1240 ; 5895,1240 5925,1210 ; 5895,1240 5925,1210 ; 5925,1210 v1(5970,1210) 5925,1210
  other v1: 5970,1210
NetU1_RS485_8_4: U1_RS485_8.4 U2_UART2.48 | length 2798.1
  Top Layer w10: U2_UART2.48@4497.64,1180.51 4509.49,1180.51 4526.69,1163.32 v1@4718.31,1163.32 ; 5895,1240 5895,1550 ; 5895,1240 5955,1180 ; 5895,1240 5895,1550 ; 5895,1240 5955,1180 ; 5895,1550 5920,1575 ; 5895,1550 5920,1575 ; 5920,1575 U1_RS485_8.4@5976.3,1575 5920,1575 ; 5955,1180 v1(5955,1150) 5955,1180
  Bottom Layer w10: v1(4718.31,1165.13) 4718.31,1104.27 4782.59,1040 5915,1040 ; 5915,1040 5955,1080 ; 5915,1040 5955,1080 ; 5955,1080 v1(5955,1150) 5955,1080
  other v1: 5955,1150
PWREN#_UART1: R10_UART1.2 U2_UART1.60 U4_UART1.13 | length 845.9
  Top Layer w10: U2_UART1.60@2504.49,1468.9 2603.9,1468.9 v1(2635,1500)
  Bottom Layer w10: v1(2635,1500) 2647.8,1512.8 U4_UART1.13@3029.76,1512.8 3132.8,1512.8 3155,1535 3155,1625 3120,1660 R10_UART1.2@3091.5,1660
PWREN#_UART2: R10_UART2.2 U2_UART2.60 U4_UART2.13 | length 845.9
  Top Layer w10: U2_UART2.60@4569.49,1468.9 4668.9,1468.9 v1(4700,1500)
  Bottom Layer w10: v1(4700,1500) 4712.8,1512.8 U4_UART2.13@5094.76,1512.8 5197.8,1512.8 5220,1535 5220,1625 5185,1660 R10_UART2.2@5156.5,1660
USB5V: F1.1 P1.1 P2.1 | length 873.5
  Bottom Layer w20: P1.1@1340,1380 1340,1440 1365,1465 F1.1@1525,1465 ; P2.1@1340,1855 1300,1855 1260,1815 1260,1575 1300,1535 F1.1@1525,1535
USB_1_N: P1.2 U2_UART1.7 | length 1492.4
  Top Layer w10: v1(2298.28,1728.28) 2314.53,1712.04 U2_UART1.7@2314.53,1619.49
  Bottom Layer w10: P1.2@1340,1301.26 1369.37,1271.89 1480,1271.89 1498.11,1290 1865,1290 1935,1360 1935,1693.28 1996.72,1755 2271.57,1755 v1(2298.28,1728.28)
USB_1_P: P1.3 U2_UART1.8 | length 1442.8
  Top Layer w10: v1(2270,1700) 2294.84,1675.16 U2_UART1.8@2294.84,1619.49
  Bottom Layer w10: P1.3@1340,1222.52 1369.37,1251.89 1488.28,1251.89 1506.39,1270 1873.28,1270 1955,1351.72 1955,1685 2005,1735 2235,1735 v1(2270,1700)
USB_2_N: P2.2 U2_UART2.7 | length 3562.6
  Top Layer w10: v1(2610,1760) 2625,1745 2880,1745 v1(2905,1770) ; v1(3308.28,1758.28) 3513.28,1758.28 v1(3525,1770) ; v1(4363.28,1728.28) 4379.53,1712.04 U2_UART2.7@4379.53,1619.49
  Bottom Layer w10: P2.2@1340,1776.26 1369.37,1746.89 1496.39,1746.89 1513.28,1730 1865,1730 1910,1775 1910,1895 1970.86,1955.86 2567.43,1955.86 2610,1913.28 v1(2610,1760) ; v1(2905,1770) 2906.72,1771.72 3294.85,1771.72 v1(3308.28,1758.28) ; v1(3525,1770) 3846.72,1770 3876.72,1800 4110,1800 4155,1755 4336.57,1755 v1(4363.28,1728.28)
USB_2_P: P2.3 U2_UART2.8 | length 3509.6
  Top Layer w10: v1(2570,1760) 2570,1757.57 2602.57,1725 2916.57,1725 v1(2933.28,1741.72) ; v1(3280,1730) 3281.72,1728.28 3539.85,1728.28 v1(3553.28,1741.72) ; v1(4335,1700) 4359.84,1675.16 U2_UART2.8@4359.84,1619.49
  Bottom Layer w10: P2.3@1340,1697.52 1369.37,1726.89 1488.11,1726.89 1505,1710 1873.28,1710 1930,1766.72 1930,1886.72 1979.14,1935.86 2539.14,1935.86 2570,1905 v1(2570,1760) ; v1(2933.28,1741.72) 3268.28,1741.72 v1(3280,1730) ; v1(3553.28,1741.72) 3846.72,1741.72 3885,1780 4101.72,1780 4146.72,1735 4300,1735 v1(4335,1700)
pads on no net: U2_UART1.18 U2_UART1.19 U2_UART1.21 U2_UART1.22 U2_UART1.23 U2_UART1.28 U2_UART1.29 U2_UART1.30 U2_UART1.32 U2_UART1.33 U2_UART1.36 U2_UART1.40 U2_UART1.41 U2_UART1.43 U2_UART1.44 U2_UART1.45 U2_UART1.53 U2_UART1.54 U2_UART1.55 U2_UART1.57 U2_UART1.58 U2_UART2.18 U2_UART2.19 U2_UART2.21 U2_UART2.22 U2_UART2.23 U2_UART2.28 U2_UART2.29 U2_UART2.30 U2_UART2.32 U2_UART2.33 U2_UART2.36 U2_UART2.40 U2_UART2.41 U2_UART2.43 U2_UART2.44 U2_UART2.45 U2_UART2.53 U2_UART2.54 U2_UART2.55 U2_UART2.57 U2_UART2.58 U3_UART1.6 U3_UART1.7 U3_UART2.6 U3_UART2.7 U4_UART1.9 U4_UART2.9
copper on no net:
  other v3: 1650,1135 6125,1135 1650,1865 6125,1865

## Polygon pours and split planes (outlines as drawn)
GND on Internal Plane 1 (split plane): 6229.9,1005.1 1020.1,1005.1 1020.1,1994.9 6229.9,1994.9
+3.3V on Internal Plane 2 (split plane): 6229.9,1005.1 1020.1,1005.1 1020.1,1994.9 6229.9,1994.9

## Keep-outs
Keep-Out Layer:
  the board outline again, w10

## Silkscreen, mask and mechanical layers (free items; w line width, h text height)
Top Overlay:
  text "Ports 5-8" at 1040,1960 h30
  text "A B GND" at 2975,1960 h30
  text "A B GND" at 3640,1960 h30
  text "A B GND" at 5040,1960 h30
  text "A B GND" at 5705,1960 h30
  text "TX" at 2670,1935 h30
  text "TX" at 4735,1935 h30
  text "TX" at 3331.18,1932.52 h30
  text "TX" at 5396.18,1932.52 h30
  text "5V D- D+ GND" at 1465,1915 h30 r270
  text "RX" at 2790,1780 h30
  text "RX" at 4855,1780 h30
  text "RX" at 3451.18,1777.52 h30
  text "RX" at 5516.18,1777.52 h30
  text "1" at 2685,1715 h60
  text "5" at 4740,1715 h60
  text "2" at 3335,1710 h60
  text "6" at 5400,1710 h60
  text "PWR / OK" at 1885,1463.81 h30
  text "5V D- D+ GND" at 1465,1435 h30 r270
  text "TX" at 2670,1275 h30
  text "TX" at 3328.7,1275 h30
  text "TX" at 4735,1275 h30
  text "TX" at 5393.7,1275 h30
  text "RX" at 2790,1120 h30
  text "RX" at 3448.7,1120 h30
  text "RX" at 4855,1120 h30
  text "RX" at 5513.7,1120 h30
  text "3" at 2675,1050 h60
  text "4" at 3333.7,1050 h60
  text "7" at 4740,1050 h60
  text "8" at 5398.7,1050 h60
  text "Data Merge Board" at 1975,1045 h40
  text "R2 - 2016" at 4180,1045 h40
  text "Ports 1-4" at 1040,1010 h30
  text "A B GND" at 2975,1010 h30
  text "A B GND" at 3640,1010 h30
  text "A B GND" at 5040,1010 h30
  text "A B GND" at 5705,1010 h30
Bottom Overlay:
  text "Designed By:" at 1885,1685 h40
  text "Daniel Dugger" at 1915,1290 h40

## Dimensions
1000,2015 to 1000,985 on Mechanical 15
1000,985 to 1650,1865 on Mechanical 15
1000,985 to 1650,1135 on Mechanical 15
1000,985 to 6250,985 on Mechanical 15
6125,1135 to 1000,985 on Mechanical 15
1650,1135 to 1000,985 on Mechanical 15